# EAGLE board ManoMeter (EAGLE 7.7.0)

Size 100 x 80 mm. Coordinates in mm from the lower left corner, seen from the top.
Outline: 0,0 100,0 100,80 0,80 0,0
Copper layers (1*16): Top 0.035mm / dielectric 1.5mm / Bottom 0.035mm
Design rules "default": minimum track width 10mil, minimum drill 24mil, track to track 8mil, track to pad 8mil, pad to pad 8mil, via to via 8mil, smd to smd 8mil, copper to edge 40mil, drill to drill 8mil, minimum pad ring 10mil, minimum via ring 8mil, stop-mask expansion 4mil, vias tented up to drill 0mil, thermal gap 10mil
Net classes: 2 Vcc: width 0.356 mm, clearance 0.203 mm; 3 Gnd: width 0.356 mm; 5 Highcurrent: width 0.356 mm

## Footprints (pad centres in the part's own frame; a part is rotated, then mirrored left to right if it is on the bottom)
C1210 = smd 1.6 x 2.7: 1 -1.4,0; 2 1.4,0
C0805 = smd 1.3 x 1.5: 1 -0.95,0; 2 0.95,0
R/2012-12R = smd 1.55 x 1.8: + 1.175,0; - -1.175,0
DO35-10 = drill 0.813 long: A 5.08,0; C -5.08,0
0805 = smd 1.3 x 1.5: 1 -0.95,0; 2 0.95,0
1X06_SMD_MALE = smd 1.02 x 6: 1 0,0; 2 2.54,0; 3 5.08,0; 4 7.62,0; 5 10.16,0; 6 12.7,0
TQFP32-08 = smd 2 x 0.508: 1 -4.505,2.8; 2 -4.505,2; 3 -4.505,1.2; 4 -4.505,0.4; 5 -4.505,-0.4; 6 -4.505,-1.2; 7 -4.505,-2; 8 -4.505,-2.8; 17 4.505,-2.8; 18 4.505,-2; 19 4.505,-1.2; 20 4.505,-0.4; 21 4.505,0.4; 22 4.505,1.2; 23 4.505,2; 24 4.505,2.8 | smd 0.508 x 2: 9 -2.8,-4.505; 10 -2,-4.505; 11 -1.2,-4.505; 12 -0.4,-4.505; 13 0.4,-4.505; 14 1.2,-4.505; 15 2,-4.505; 16 2.8,-4.505; 25 2.8,4.505; 26 2,4.505; 27 1.2,4.505; 28 0.4,4.505; 29 -0.4,4.505; 30 -1.2,4.505; 31 -2,4.505; 32 -2.8,4.505
SOIC127P600X180-16N = smd 1.31 x 0.62: 1 -2.75,4.445; 2 -2.75,3.175; 3 -2.75,1.905; 4 -2.75,0.635; 5 -2.75,-0.635; 6 -2.75,-1.905; 7 -2.75,-3.175; 8 -2.75,-4.445; 9 2.75,-4.445; 10 2.75,-3.175; 11 2.75,-1.905; 12 2.75,-0.635; 13 2.75,0.635; 14 2.75,1.905; 15 2.75,3.175; 16 2.75,4.445
SOP50P490X110-10N = smd 1.47 x 0.28: 1 -2.15,1; 2 -2.15,0.5; 3 -2.15,0; 4 -2.15,-0.5; 5 -2.15,-1; 6 2.15,-1; 7 2.15,-0.5; 8 2.15,0; 9 2.15,0.5; 10 2.15,1
2X3P-2.54-SMD = smd 3.2 x 1.524: 1 -2.54,2.54; 2 2.54,2.54; 3 -2.54,0; 4 2.54,0; 5 -2.54,-2.54; 6 2.54,-2.54
USB-MINIB = smd 2.5 x 0.5: D+ 2.5,0; D- 2.5,0.8; GND 2.5,-1.6; ID 2.5,-0.8; VBUS 2.5,1.6 | smd 2.5 x 2: S1 -3,4.5; S2 2.5,4.5; S3 -3,-4.5; S4 2.5,-4.5
0805@1 = smd 1.3 x 1.5: 1 -0.95,0; 2 0.95,0
B25P = drill 0.813 octagon: A -2.54,0; E 2.54,0; S 0,2.54
0204/5 = drill 0.813 octagon: 1 -2.54,0; 2 2.54,0
M0805 = smd 1.3 x 1.6: 1 -0.95,0; 2 0.95,0
TL3XPO = drill 1.1 pad 1.422 long: 1 -2.54,0; 2 0,0; 3 2.54,0
SOLDERJUMPER_REFLOW = smd 1.168 x 1.6: 1 -0.762,0; 2 0.762,0
22-23-2021 = drill 1 long: 1 -1.27,0; 2 1.27,0
NX5032 = smd 2 x 2.4: P$1 2,0; P$2 -2,0

## Placement (x,y rotation side)
C1  10u  [C1210]  -73.66,-24.13 0 top  (outside the outline)
C2  10u  [C1210]  -82.55,-24.13 0 top  (outside the outline)
C3  100n  [C0805]  -82.55,-33.02 0 top  (outside the outline)
C14  100n  [C0805]  -22.86,58.42 0 top  (outside the outline)
C15  100N  [C0805]  -43.18,49.53 0 top  (outside the outline)
C16  10u  [C1210]  -57.15,38.1 0 top  (outside the outline)
C17  22p  [C0805]  -45.72,58.42 0 top  (outside the outline)
C18  22p  [C0805]  -50.8,58.42 0 top  (outside the outline)
C19  10uF  [R/2012-12R]  -55.88,58.42 0 top  (outside the outline)
C21  100N  [C0805]  -49.53,49.53 0 top  (outside the outline)
C22  100n  [C0805]  -29.21,58.42 0 top  (outside the outline)
C24  100n  [C0805]  -35.56,58.42 0 top  (outside the outline)
C25  100N  [C0805]  -55.88,49.53 0 top  (outside the outline)
C26  100N  [C0805]  -16.51,58.42 0 top  (outside the outline)
D1  1N4148DO35-10  [DO35-10]  -31.75,49.53 0 top  (outside the outline)
FB1  MMZ2012Y152B  [0805]  -82.55,-39.37 0 top  (outside the outline)
FB2  MMZ2012Y152B  [0805]  -82.55,-44.45 0 top  (outside the outline)
IC1  MPS20N0040D-S  [1X06_SMD_MALE]  -34.29,39.37 0 top  (outside the outline)
IC2  ATMEGA328P-32PIN-AU  [TQFP32-08]  -36.83,24.13 0 top  (outside the outline)
IC3  CH340C  [SOIC127P600X180-16N]  -46.99,8.89 0 top  (outside the outline)
IC4  ADS1115IDGST  [SOP50P490X110-10N]  -63.5,-7.62 0 top  (outside the outline)
ISP  [2X3P-2.54-SMD]  -46.99,39.37 0 top  (outside the outline)
K2  USB_MINI-B_SMT  [USB-MINIB]  -20.32,26.67 0 top  (outside the outline)
L1  10uH  [0805@1]  -36.83,63.5 0 top  (outside the outline)
R1  10K  [B25P]  -16.51,40.64 0 top  (outside the outline)
R2  390  [0204/5]  -16.51,64.77 0 top  (outside the outline)
R3  1k  [0204/5]  -24.13,64.77 0 top  (outside the outline)
R4  4K7  [M0805]  -64.77,-13.97 0 top  (outside the outline)
R5  4K7  [M0805]  -64.77,-20.32 0 top  (outside the outline)
R6  4K7  [M0805]  -64.77,-26.67 0 top  (outside the outline)
R47  10K  [M0805]  -40.64,58.42 0 top  (outside the outline)
S1  Manual/Off/Auto  [TL3XPO]  -57.15,25.4 0 top  (outside the outline)
SJ5  [SOLDERJUMPER_REFLOW]  -30.48,63.5 0 top  (outside the outline)
X1  [22-23-2021]  -39.37,38.1 0 top  (outside the outline)
X2  16Mhz  [NX5032]  -16.51,50.8 0 top  (outside the outline)

## Library data of the parts
C1 C2 C16 = rcl; FABRIKANTNO: GRM32ER61A106KA01L
C3 C14 C15 C19 C21 C22 C24-C26 R2-R6 R47 = rcl
C17 C18 = rcl; FARNELL: 1759489
D1 = diode
FB1 FB2 SJ5 = microbuilder
IC1 = SparkFun-Connectors
IC2 = avr; FARNELL: 1972086
IC3 = CH340C; AVAILABILITY: Not in stock; DESCRIPTION: USB to serial chip CH340; MF: WCH; MP: CH340C; PACKAGE: None; PRICE: None
IC4 = ADS1115IDGST; AVAILABILITY: In Stock; CHECK_PRICES: https://www.snapeda.com/parts/ADS1115IDGST/Texas+Instruments/view-part/?ref=eda; DESCRIPTION: 16-bit, 860-SPS, 4-channel, delta-sigma ADC with PGA, oscillator, VREF, comparator and I2C; MF: Texas Instruments; MP: ADS1115IDGST; PACKAGE: VSSOP-10 Texas Instruments; PRICE: None; PURCHASE-URL: https://www.snapeda.com/api/url_track_click_mouser/?unipart_id=45901&manufacturer=Texas Instruments&part_name=ADS1115IDGST&search_term=ads1115; SNAPEDA_LINK: https://www.snapeda.com/parts/ADS1115IDGST/Texas+Instruments/view-part/?ref=snap
ISP = HR911105; FARNELL: 9689567
K2 = SparkFun-Connectors; FARNELL: 1753806; PROD_ID: CONN-08193; SF_ID: PRT-00587
L1 = microbuilder; FARNELL: 2215650
R1 = pot
S1 = switch
X1 = con-molex; MF: MOLEX; MPN: 22-23-2021; OC_FARNELL: 1462926; OC_NEWARK: 25C3832
X2 = adafruit; FARNELL: 2467791

## Nets
+5V [Vcc]: C1.1 C2.1 C3.2 C14.2 C16.1 C19.+ C22.2 C24.2 FB1.1 FB1.2 IC1.2 IC2.4 IC2.6 IC3.16 IC4.8 ISP.2 L1.2 R1.A R4.2 R5.2 R6.2 R47.2 SJ5.2
AGND: C1.2 C3.1 FB2.2 IC1.5 IC4.3
GND: C2.2 C14.1 C15.2 C16.2 C17.2 C18.2 C19.- C21.2 C22.1 C24.1 C26.2 D1.A FB2.1 IC2.3 IC2.5 IC2.21 IC3.1 IC4.1 ISP.6 K2.GND K2.S1 K2.S2 K2.S3 K2.S4 R1.E R3.1 S1.2
MISO: ISP.1
MOSI: ISP.4
N$1: IC2.32 S1.3
N$2: IC1.3 IC4.7
N$3: IC1.1 IC1.6 IC4.6
N$4: IC2.28 IC4.10 R6.1
N$6: IC2.27 IC4.9 R5.1
N$7: IC2.26 IC4.2 R4.1
N$8: IC2.23 R1.S
N$9: IC2.1 R2.1
N$10: R2.2 R3.2
N$11: D1.C X1.2
N$12: IC2.2 S1.1
N$21: IC3.6 K2.D-
N$22: C15.1 IC3.4
N$32: C26.1 IC2.20
N$33: C25.1 IC3.13
N$34: IC3.5 K2.D+
N$36: IC2.31 IC3.3
N$37: K2.VBUS SJ5.1
N$40: C21.1 IC2.18 L1.1
N$46: IC2.30 IC3.2
N$49: C18.1 IC2.7 X2.P$2
N$51: C17.1 IC2.8 X2.P$1
RESET: C25.2 IC2.29 ISP.5 R47.1
SCLK: ISP.3
VCC: X1.1

## Tracks (layer width: path | path; a pad name or v marks a point on that pad's centre or on a via)
+5V  (22 unrouted)
AGND  (4 unrouted)
GND  (26 unrouted)
N$1  (1 unrouted)
N$2  (1 unrouted)
N$3  (2 unrouted)
N$4  (2 unrouted)
N$6  (2 unrouted)
N$7  (2 unrouted)
N$8  (1 unrouted)
N$9  (1 unrouted)
N$10  (1 unrouted)
N$11  (1 unrouted)
N$12  (1 unrouted)
N$21  (1 unrouted)
N$22  (1 unrouted)
N$32  (1 unrouted)
N$33  (1 unrouted)
N$34  (1 unrouted)
N$36  (1 unrouted)
N$37  (1 unrouted)
N$40  (2 unrouted)
N$46  (1 unrouted)
N$49  (2 unrouted)
N$51  (2 unrouted)
RESET  (3 unrouted)